# Altium PCB esp32_v2.PcbDoc
Units mil, origin at the board's own origin, x right, y up, seen from the top; angles counter-clockwise.
Board outline 3049 x 1672 mil, 2 copper layers (Top Layer, Bottom Layer); 49 components, 59 nets, 208 pads, 91 vias.
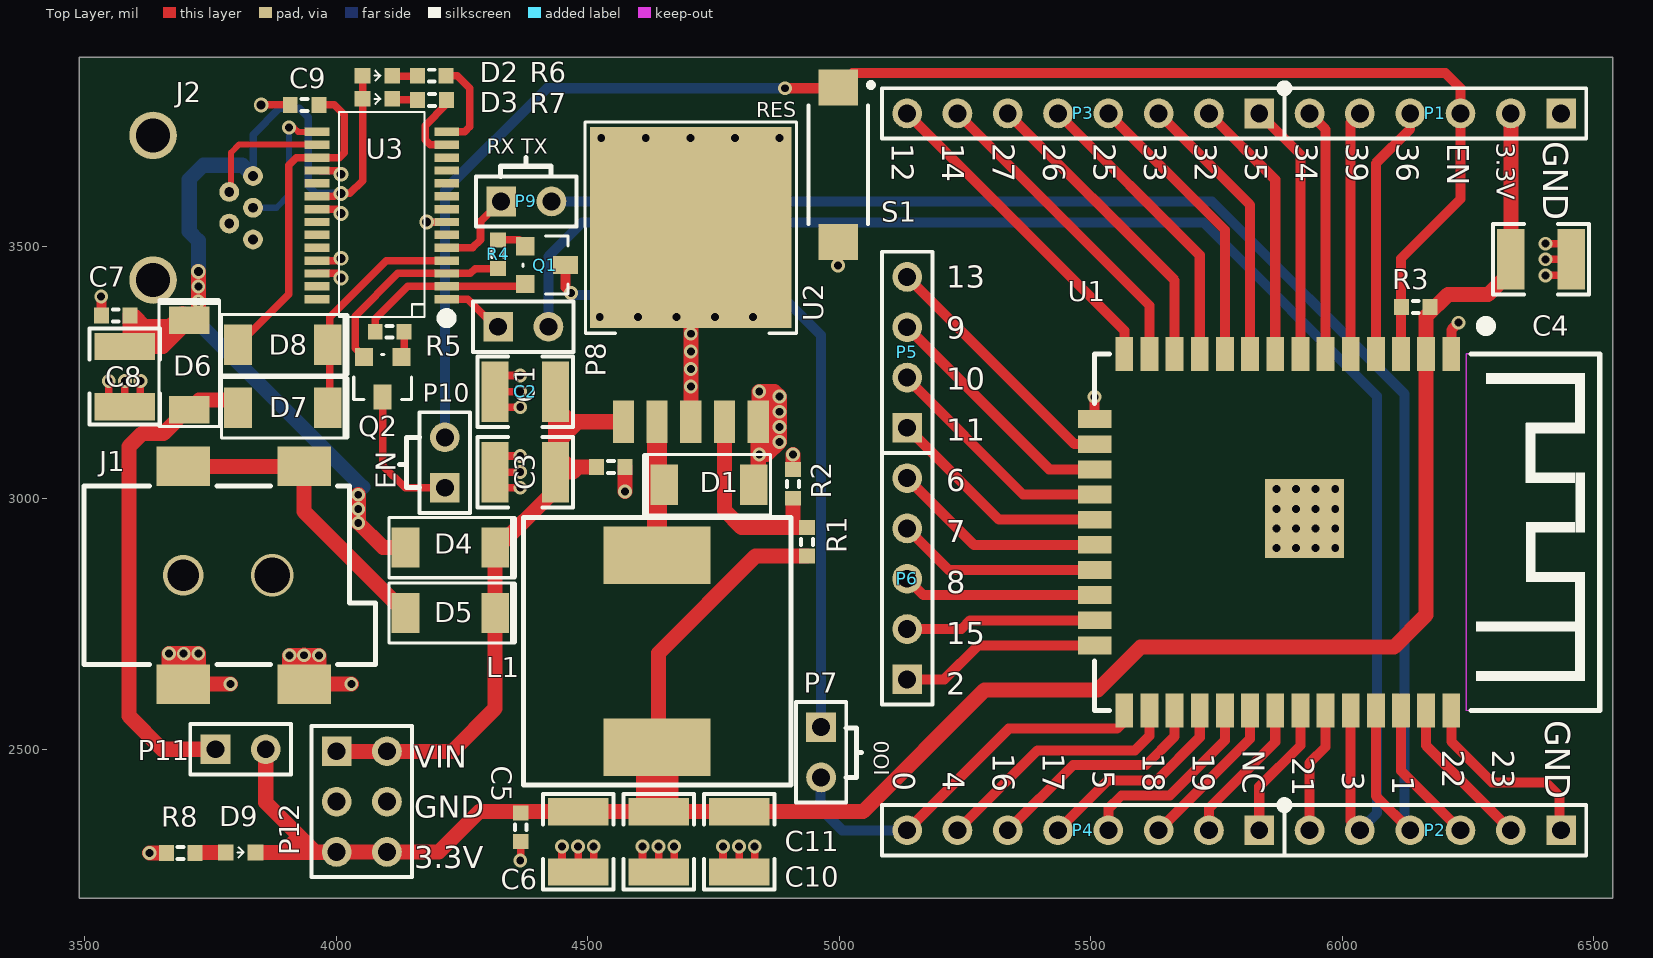
[diagram p0: Top Layer view]
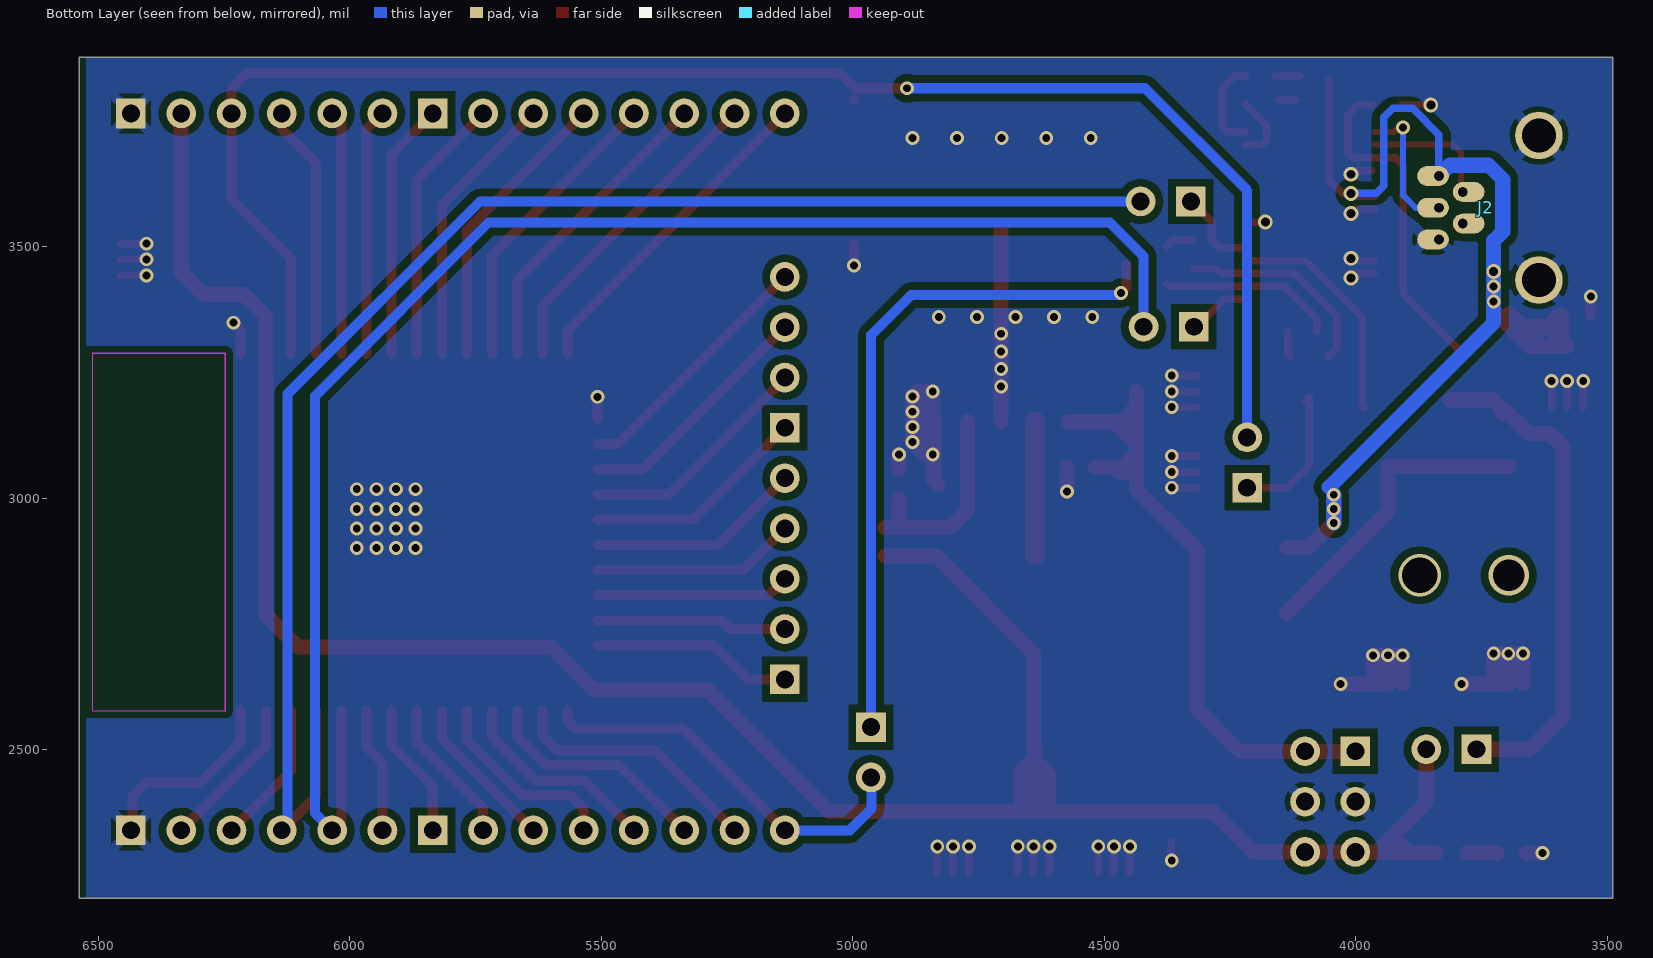
[diagram p1: Bottom Layer view, seen from below]
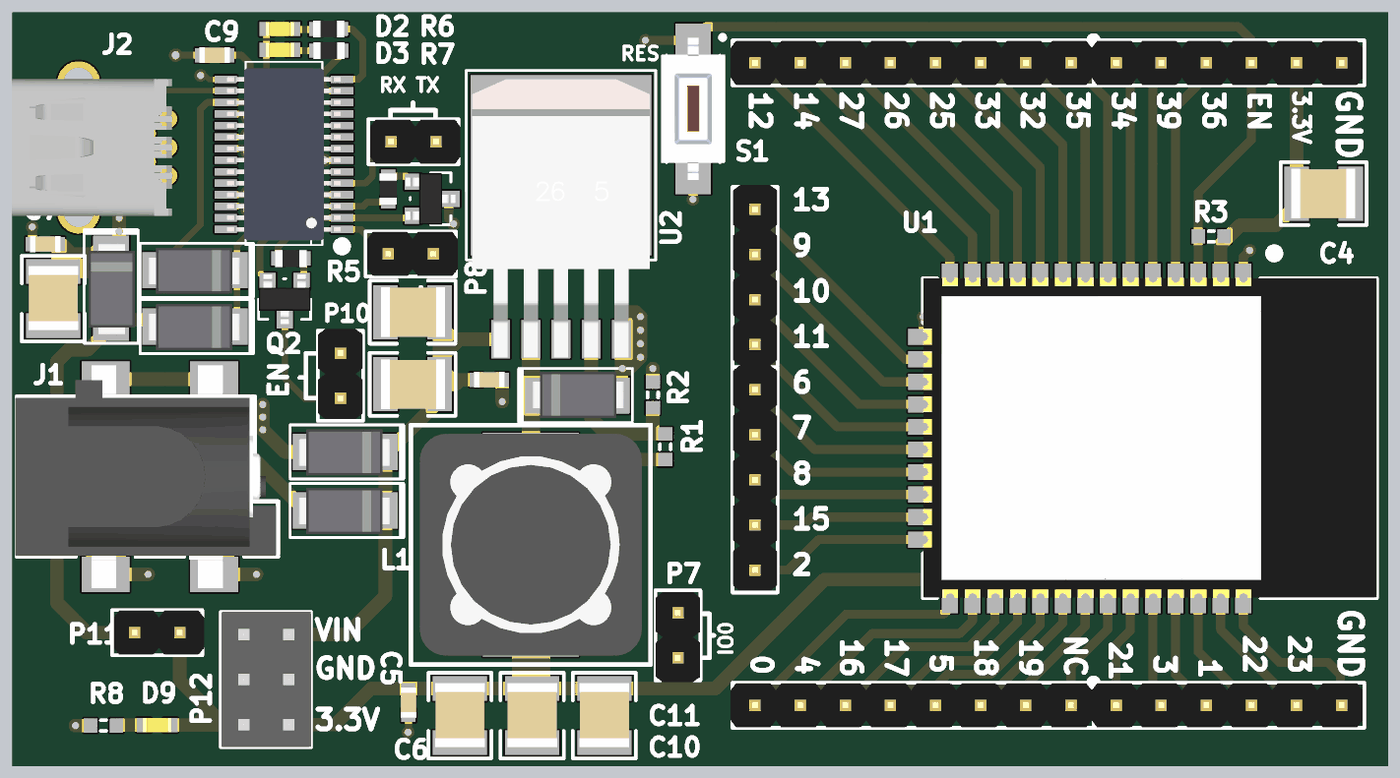
[diagram p2: 3D render of the assembled board from above, using the file's embedded part models]

## Layer stack, top to bottom
Top Solder: solder mask 0.4, Solder Resist, Dk 3.5
Top Layer: signal copper 1.4
Dielectric 1: dielectric 12.6, FR-4, Dk 4.8
Bottom Layer: signal copper 1.4
Bottom Solder: solder mask 0.4, Solder Resist, Dk 3.5

## Board outline
3489,2205 6538,2205 6538,3877 3489,3877

## Design rules (kind name [scope] priority, off if disabled: settings)
Clearance POLYGON [InPolygon] p1: gap=15 ignorepadtopadclearanceinfootprint=FALSE
Clearance [All] p2 off: gap=59.06 ignorepadtopadclearanceinfootprint=FALSE except(0: Arc-Hole Track-Hole SMDPad-Hole THPad-Hole Via-Hole Fill-Hole Poly-Hole Region-Hole Text-Hole)
ComponentClearance P1_P3 [InComponent('P1') vs InComponent('P3')] p1: gap=0 collisioncheckmode=3 verticalgap=0 showdistances=FALSE
ComponentClearance P6_P5 [InComponent('P5') vs InComponent('P6')] p2: gap=0 collisioncheckmode=3 verticalgap=0 showdistances=FALSE
ComponentClearance P4_P2 [InComponent('P4') vs InComponent('P2')] p3: gap=0 collisioncheckmode=3 verticalgap=0 showdistances=FALSE
ComponentClearance [All] p4: gap=10 collisioncheckmode=3 verticalgap=10 showdistances=FALSE
FabricationTestPointUsage TestPointUsage [All] p1: valid=0 allowmultiple=FALSE
FabricationTestpoint Testpoint [All] p1: side=3 testpointundercomponent=TRUE minsize=40 maxsize=100 preferedsize=60 minholesize=20 maxholesize=40 preferedholesize=32 testpointgrid=1 allowsidetop=TRUE allowsidebottom=TRUE usegrid=TRUE gridtolerance=0.01
HoleSize [All] p1: absolutevalues=TRUE maxlimit=393.7 minlimit=15.75 maxpercent=80.000 minpercent=20.000
MinimumAnnularRing [All] p1: minimumring=5.91
MinimumSolderMaskSliver [All] p1: minsoldermaskwidth=1
PlaneConnect [All] p1: planeconnectstyle=Direct reliefexpansion=20 reliefentries=4 reliefconductorwidth=10 reliefairgap=10
PolygonConnect Via [IsVia] p1: connectstyle=Direct reliefconductorwidth=10 reliefentries=4 polygonreliefangle="90 Angle" airgapwidth=10
PolygonConnect [All] p2: connectstyle=Relief reliefconductorwidth=20 reliefentries=4 polygonreliefangle="45 Angle" airgapwidth=10
RoutingVias [All] p1: holewidth=19.68 width=39.37 viastyle="Through Hole" minholewidth=15.75 minwidth=27.56 maxholewidth=28 maxwidth=196.85
SilkToSilkClearance [All] p1: silktosilkclearance=1
SilkToSolderMaskClearance [IsPad] p1: minsilkscreentomaskgap=2 clearancetoexposedcopper=TRUE
SolderMaskExpansion [All] p1: expansion=4
Width [All] p1: maxlimit=80 minlimit=6 preferedwidth=10
22 further rules are at their usual default settings.

## Components (designator, comment, footprint, x,y, rotation, side; value= is the part's Value field where it differs from the comment)
C1 "Ceramic X7R" C_0603_1608 4546,3062 r0 top value=100nF
C2 "Ceramic X5R" C_1210_3225 4376,3212 r180 top value=100uF
C3 "Ceramic X5R" C_1210_3225 4376,3052 r180 top value=100uF
C4 "Ceramic X5R" C_1210_3225 6395,3475 r0 top value=100uF
C5 "Ceramic X7R" C_0603_1608 4367,2346 r270 top value=100nF
C6 "Ceramic X5R" C_1210_3225 4481,2317 r270 top value=100uF
C7 "Ceramic X7R" C_0603_1608 3562,3363 r180 top value=100nF
C8 "Ceramic X5R" C_1210_3225 3580,3242 r270 top value=100uF
C9 "Ceramic X7R" C_0603_1608 3937.46,3782 r180 top value=100nF
C10 "Ceramic X5R" C_1210_3225 4641,2317 r270 top value=100uF
C11 "Ceramic X5R" C_1210_3225 4801,2317 r270 top value=100uF
D1 "SS14" SMA_DO-214AC 4741,3027 r0 top
D2 "Blue Led" OL_0603_1608 4082,3840 r180 top value=LTST-C190TBKT
D3 "Blue Led" OL_0603_1608 4082,3794 r180 top value=LTST-C190TBKT
D4 "SS14" SMA_DO-214AC 4227,2902 r180 top
D5 "SS14" SMA_DO-214AC 4227,2772 r180 top
D6 "SS14" SMA_DO-214AC 3708,3265 r270 top
D7 "SS14" SMA_DO-214AC 3894,3180 r180 top
D8 "SS14" SMA_DO-214AC 3894,3305 r180 top
D9 "Blue Led" OL_0603_1608 3810,2296 r180 top value=LTST-C190TBKT
J1 "J_DC" DC_5.5 3696,2847 r0 top
J2 "USB connector" J_USB_MINIB_54819-0519_THT 3741.32,3577.47 r0 top value=54819-0519
L1 "Inductor" L_SRR1280-XXXY 4638,2696.06 r270 top value=27uH
P1 "Goldpin" P_HEADER_1x6_2.54 6435,3765 r180 top value=DS1021-1*6SF1-1
P2 "Goldpin" P_HEADER_1x6_2.54 6435,2340 r180 top value=DS1021-1*6SF1-1
P3 "Goldpin" P_HEADER_1x8_2.54 5835,3765 r180 top value=DS1021-1*8SF1-1
P4 "Goldpin" P_HEADER_1x8_2.54 5835,2340 r180 top value=DS1021-1*8SF1-1
P5 "Goldpin" P_HEADER_1x4_2.54 5135,3140 r90 top value=DS1021-1*4SF1-1
P6 "Goldpin" P_HEADER_1x5_2.54 5135,2640 r90 top value=DS1021-1*5SF1-1
P7 "Goldpin" P_HEADER_1x2_2.54 4964,2545 r270 top value=DS1021-1*2SF1-1
P8 "Goldpin" P_HEADER_1x2_2.54 4322,3341 r0 top value=DS1021-1*2SF1-1
P9 "Goldpin" P_HEADER_1x2_2.54 4328,3590 r0 top value=DS1021-1*2SF1-1
P10 "Goldpin" P_HEADER_1x2_2.54 4216.14,3021 r90 top value=DS1021-1*2SF1-1
P11 "Goldpin" P_HEADER_1x2_2.54 3760,2501 r0 top value=DS1021-1*2SF1-1
P12 "Goldpin" P_HEADER_2x3_2.54 4001,2497 r270 top value="=\"Manufacturer Part Number\""
Q1 "BC847C" SOT23_TO236_SC59 4416,3463.5 r270 top value=BC847CLT1G
Q2 "BC847C" SOT23_TO236_SC59 4092.5,3241 r180 top value=BC847CLT1G
R1 "Resistor" R_NC_0603_1608 4936,2913.46 r270 top value=NC
R2 "Resistor" R_NC_0603_1608 4908.44,3028.46 r270 top value=NC
R3 "Resistor" R_NC_0603_1608 6146,3380 r180 top value=NC
R4 "Resistor" R_0603_1608 4322,3485 r90 top value=1k
R5 "Resistor" R_0603_1608 4106.43,3331 r0 top value=1k
R6 "Resistor" R_0603_1608 4190.09,3840 r180 top value=200R
R7 "Resistor" R_0603_1608 4190.54,3792 r180 top value=200R
R8 "Resistor" R_NC_0603_1608 3691,2295 r0 top value=NC
S1 "3x6mm" S_TACTSWITCH3x6 4998,3663 r270 top
U1 "U_ESP32" ESP_WROOM_32 5891.73,2932.44 r270 top value="=\"Manufacturer Part Number\""
U2 "VR_LM2596" TO-263-6 4705,3508 r0 top value="=\"Manufacturer Part Number\""
U3 "U_FT232RL" SSOP28_5X10X17 4091,3562 r90 top value="=\"Manufacturer Part Number\""

## Footprints (in the part's own frame and the unit in brackets; to place one, negate y for a bottom-side part, rotate by r counter-clockwise, add the part's x,y. Pads: shape width x height; smd on the part's side, far side on the other; paste and mask are expansions set on the pad)
C_0603_1608 [mm]
  rect 0.75x0.8 smd: 1(-0.725,0) 2(0.725,0)
  silkscreen extent -0.15,-0.3 0.15,0.3, body extent -0.85,-0.45 0.85,0.45, height 0.89
C_1210_3225 [mil]
  rect 54x120 smd: 1(-60,0) 2(60,0)
  silkscreen extent -95,-70 95,70, body extent -72,-55 70,55, height 86
DC_5.5 [mm]
  rect 2.7x2 smd: 1(0,-5.5) 2(6.1,-5.5) 3(0,5.5) 3(6.1,5.5)
  silkscreen extent -5,-4.5 9.7,4.5, body extent -5.1,-6.28 9.6,6.28, height 10.89
ESP_WROOM_32 [mm] "Normal"
  rect 1.7x0.9 smd: 1(-9,8.255) 2(-9,6.985) 3(-9,5.715) 4(-9,4.445) 5(-9,3.175) 6(-9,1.905) 7(-9,0.635) 8(-9,-0.635) 9(-9,-1.905) 10(-9,-3.175) 11(-9,-4.445) 12(-9,-5.715) 13(-9,-6.985) 14(-9,-8.255) 25(9,-8.255) 26(9,-6.985) 27(9,-5.715) 28(9,-4.445) 29(9,-3.175) 30(9,-1.905) 31(9,-0.635) 32(9,0.635) 33(9,1.905) 34(9,3.175) 35(9,4.445) 36(9,5.715) 37(9,6.985) 38(9,8.255)
  rect 0.9x1.7 smd: 15(-5.715,-9.755) 16(-4.445,-9.755) 17(-3.175,-9.755) 18(-1.905,-9.755) 19(-0.635,-9.755) 20(0.635,-9.755) 21(1.905,-9.755) 22(3.175,-9.755) 23(4.445,-9.755) 24(5.715,-9.755)
  rect 4x4 smd: EP1(-0.7,0.845)
  Keep-Out Layer region: -9.026,15.75 9,15.75 9,9.026 -9.026,9.026
  Keep-Out Layer region: -9.012,15.75 9,15.75 9,9.012 -9.012,9.012
  Keep-Out Layer region: -9.024,15.75 9,15.75 9,9.024 -9.024,9.024
  Keep-Out Layer region: -9.026,15.75 9,15.75 9,9.026 -9.026,9.026
  Keep-Out Layer region: -9.012,15.75 9,15.75 9,9.012 -9.012,9.012
  Keep-Out Layer region: -9.024,15.75 9,15.75 9,9.024 -9.024,9.024
  Keep-Out Layer region: -9.026,15.75 9,15.75 9,9.026 -9.026,9.026
  Keep-Out Layer region: -9.012,15.75 9,15.75 9,9.012 -9.012,9.012
  Keep-Out Layer region: -9.024,15.75 9,15.75 9,9.024 -9.024,9.024
  silkscreen extent -10.67,-9.75 9,15.75, body extent -9.05,-9.77 9.02,15.77, height 3
J_USB_MINIB_54819-0519_THT [mm]
  round 1 hole 0.5: 1(2.375,1.6) 2(1.175,0.8) 3(2.375,0) 4(1.175,-0.8) 5(2.375,-1.6)
  oval 1.6x1 smd far side paste-100: 1(2.675,1.6) 2(0.875,0.8) 3(2.675,0) 4(0.875,-0.8) 5(2.675,-1.6)
  round 2.4 hole 1.7: 6(-2.675,-3.65) 6(-2.675,3.65)
  Top Layer pour cut-out: -4.425,3.1 -3.225,3.1 -3.225,-3.1 -4.425,-3.1
  Top Layer pour cut-out: 0.575,4.4 3.075,4.4 3.075,3 0.575,3
  Top Layer pour cut-out: 0.575,-4.3 3.075,-4.3 3.075,-2.9 0.575,-2.9
  body extent -6.42,-3.85 2.58,3.85, height 3.75
L_SRR1280-XXXY [mm]
  rect 2.9x5.4 smd: 1(-4.85,0) 2(4.85,0)
  silkscreen extent -6.75,-6.75 6.75,6.75, body extent -6.25,-6.25 6.25,6.25, height 7.51
OL_0603_1608 [mm]
  rect 0.8x0.8 smd: 1(-0.75,0) 2(0.75,0)
  silkscreen extent -0.15,-0.25 0.15,0.25, body extent -0.8,-0.4 0.8,0.4, height 0.75
P_HEADER_1x2_2.54 [mm] "Connector; Header; 2 Position; Straight; Male"
  rect 1.5x1.5 hole 0.9: 1(0,0)
  round 1.5 hole 0.9: 2(2.54,0)
  silkscreen extent -1.27,-1.27 3.81,1.27, body extent -1.17,-1.25 3.91,1.25, height 8.2
P_HEADER_1x4_2.54 [mm] "Connector; Header; 4 Position; Male"
  rect 1.5x1.5 hole 0.9: 1(0,0)
  round 1.5 hole 0.9: 2(2.54,0) 3(5.08,0) 4(7.62,0)
  silkscreen extent -1.27,-1.27 8.89,1.27, body extent -1.17,-1.25 8.99,1.25, height 8.2
P_HEADER_1x5_2.54 [mm] "Connector; Header; 5 Position, Male"
  rect 1.5x1.5 hole 0.9: 1(0,0)
  round 1.5 hole 0.9: 2(2.54,0) 3(5.08,0) 4(7.62,0) 5(10.16,0)
  silkscreen extent -1.27,-1.27 11.43,1.27, body extent -1.17,-1.25 11.53,1.25, height 8.2
P_HEADER_1x6_2.54 [mm] "Connector; Header; 6 Position, Male"
  rect 1.5x1.5 hole 0.9: 1(0,0)
  round 1.5 hole 0.9: 2(2.54,0) 3(5.08,0) 4(7.62,0) 5(10.16,0) 6(12.7,0)
  silkscreen extent -1.27,-1.27 13.97,1.27, body extent -1.17,-1.25 14.07,1.25, height 8.2
P_HEADER_1x8_2.54 [mm] "Connector; Header; 8 Position; Male"
  rect 1.5x1.5 hole 0.9: 1(0,0)
  round 1.5 hole 0.9: 2(2.54,0) 3(5.08,0) 4(7.62,0) 5(10.16,0) 6(12.7,0) 7(15.24,0) 8(17.78,0)
  silkscreen extent -1.47,-1.47 19.05,1.27, body extent -1.17,-1.25 19.15,1.25, height 8.2
P_HEADER_2x3_2.54 [mm] "Connector; Header; 3x2 Position"
  rect 1.5x1.5 hole 0.9: 1(0,0)
  round 1.5 hole 0.9: 2(0,2.54) 3(2.54,0) 4(2.54,2.54) 5(5.08,0) 6(5.08,2.54)
  silkscreen extent -1.27,-1.27 6.35,3.81, body extent -1.27,-1.23 6.35,3.81, height 8.5
R_0603_1608 [mm]
  rect 0.75x0.8 smd: 1(-0.725,0) 2(0.725,0)
  silkscreen extent -0.15,-0.3 0.15,0.3, body extent -0.87,-0.47 0.88,0.48, height 0.54
R_NC_0603_1608 [mm]
  rect 0.75x0.8 smd: 1(-0.725,0) 2(0.725,0)
  silkscreen extent -0.15,-0.3 0.15,0.3, body extent -0.87,-0.47 0.88,0.48, height 0.54
S_TACTSWITCH3x6 [mm] "SODFL, 2-Leads, Body 3,00x8,00mm, IPC Medium Density"
  rect 1.8x2 smd: 1(-3.9,0) 2(3.9,0)
  silkscreen extent -4.15,-1.5 3,1.78, body extent -4,-1.8 4,1.8, height 2.6
SMA_DO-214AC [mil]
  rect 55x80 smd: 1(-89,0) 2(89,0)
  silkscreen extent -133,-60 122,60, body extent -100,-50 104,52, height 95
SOT23_TO236_SC59 [mil]
  rect 36x36 smd: 1(-37.5,-40) 2(37.5,-40)
  rect 36x50 smd: 3(0,40)
  silkscreen extent -57,-45 58,45, body extent -57,-55 57,55, height 51
SSOP28_5X10X17 [mm]
  rect 0.42x1.25 smd: 1(-4.225,-3.275) 2(-3.575,-3.275) 3(-2.925,-3.275) 4(-2.275,-3.275) 5(-1.625,-3.275) 6(-0.975,-3.275) 7(-0.325,-3.275) 8(0.325,-3.275) 9(0.975,-3.275) 10(1.625,-3.275) 11(2.275,-3.275) 12(2.925,-3.275) 13(3.575,-3.275) 14(4.225,-3.275) 15(4.225,3.275) 16(3.575,3.275) 17(2.925,3.275) 18(2.275,3.275) 19(1.625,3.275) 20(0.975,3.275) 21(0.325,3.275) 22(-0.325,3.275) 23(-0.975,3.275) 24(-1.625,3.275) 25(-2.275,3.275) 26(-2.925,3.275) 27(-3.575,3.275) 28(-4.225,3.275)
  silkscreen extent -5.43,-3.52 5.22,2.16, body extent -4.85,-3.2 4.85,3.2, height 1.02
TO-263-6 [mil]
  rect 42x85 smd: 1(-134,-356) 2(-67,-356) 3(0,-356) 4(67,-356) 5(134,-356)
  rect 400x400 smd: EP1(0,30)
  silkscreen extent -210,-180 210,240, body extent -197,-396 197,220, height 190

## Part data
C1 C5 C7 C9: library part C_100nF_50V_X7R_0603_5, "Capacitor", Dielectric=X7R, Manufacturer=Samsung, Manufacturer Part Number=CL10B104JB8NNNC, Tolerance (%)=5, Voltage=50V, HelpURL=http://www.tme.eu/pl/Document/4a42202b32dab16128fe107dd69598cc/samsung-chip-cap.pdf, Part Number=C_100nF_50V_X7R_0603_5, SCH_Footprint=0603, Supplier 1=TME, Supplier 2="RS Components", Supplier 3=Farnell, Supplier 4=Mouser, Supplier 5=Digi-Key, Supplier Part Number 1=CL10B104JB8NNNC
C2 C3 C4 C6 C8 C10 C11: library part C_100uF_6.3V_X5R_1210_20, "Capacitor", Dielectric=X5R, Manufacturer=TDK, Manufacturer Part Number=C3225X5R0J107M250AC, Tolerance (%)=20, Voltage=6.3V, HelpURL=https://datasheet.octopart.com/C3225X5R0J107M250AC-TDK-datasheet-41194876.pdf, Part Number=C_100uF_6.3V_X5R_1210_20, SCH_Footprint=1210, Supplier 1=TME, Supplier 2="RS Components", Supplier 3=Farnell, Supplier 4=Mouser, Supplier 5=Digi-Key, Supplier Part Number 2=7407685P, Supplier Part Number 3=2522162, Supplier Part Number 4=810-C3225X5R0J107M, Supplier Part Number 5=445-1437-1-ND
D1 D4 D5 D6 D7 D8: library part DS_SS14_1A_40V_SMA, Current=1A, Manufacturer="Fairchild Semiconductor", Voltage=40V, HelpURL=https://www.vishay.com/docs/88746/ss12.pdf, Manufacturer Part Number=SS14, Part Number=DS_SS14_1A_40V_SMA, SCH_Footprint=SMA, Supplier 1=TME, Supplier 2="RS Components", Supplier 3=Farnell, Supplier 4=Mouser, Supplier 5=Digi-Key, Supplier Part Number 4=512-SS14, Supplier Part Number 5=SS14CT
D2 D3 D9: library part OL_B_0603, "LED_BLUE", Manufacturer=Lite-On, Manufacturer Part Number=LTST-C190TBKT, HelpURL=https://datasheet.octopart.com/LTST-C190TBKT-Lite-On-datasheet-158557.pdf, Part Number=OL_B_0603, SCH_Footprint=0603, Supplier 1=TME, Supplier 2="RS Components", Supplier 3=Farnell, Supplier 4=Mouser, Supplier 5=Digi-Key, Supplier Part Number 1=LTST-C190TBKT, Supplier Part Number 2=6920994P, Supplier Part Number 4=859-LTST-C190TBKT, Supplier Part Number 5=160-1646-1-ND
J1: library part J_DC_5.5mm, Part Number=J_DC_5.5mm, Supplier 1=TME, Supplier 2="RS Components", Supplier 3=Farnell, Supplier 4=Mouser, Supplier 5=Digi-Key
J2: library part J_USB_MINIB_54819-0519, "Z³¹cze USB, Mini USB typu B, USB 2.0 OTG, Monta¿ przewlekany", Manufacturer=Molex, Manufacturer Part Number=54819-0519, Supplier Part Number 1=MX-54819-0519, Component Type=Standard, HelpURL=http://www.molex.com/pdm_docs/sd/548190519_sd.pdf, Part Number=J_USB_MINIB_54819-0519, SCH_Footprint=THT, Supplier 1=TME, Supplier 2="RS Components", Supplier 3=Farnell, Supplier 4=Mouser, Supplier 5=Digi-Key, Supplier Part Number 2=5152005P, Supplier Part Number 3=9786465, Supplier Part Number 4=538-54819-0519
L1: library part L_27uH_3.9A_SRR1280, "Induction", Current=3.9A, Manufacturer=Bourns, Manufacturer Part Number=SRR1280-270M, Resistance=52mR, HelpURL=https://www.bourns.com/pdfs/SRR1280.pdf, Part Number=L_27uH_3.9A_SRR1280, SCH_Footprint=12x12, Supplier 1=TME, Supplier 2="RS Components", Supplier 3=Farnell, Supplier 4=Mouser, Supplier 5=Digi-Key, Supplier Part Number 2=8749766P, Supplier Part Number 3=2333859, Supplier Part Number 4=652-SRR1280-270M
P1 P2: library part P_HEADER_1x6_2.54, "Header, 6-Pin", Manufacturer=Connfly, Manufacturer Part Number=DS1021-1*6SF1-1, Supplier Part Number 1=ZL201-06G, Component Type=Standard, HelpURL=http://www.tme.eu/en/Document/cc301e58a5da78cb543a94b5a5b7f06a/DS1021.pdf, Part Number=P_HEADER_1x6_2.54, SCH_Footprint="1x6 2.54mm", Supplier 1=TME, Supplier 2="RS Components", Supplier 3=Farnell, Supplier 4=Mouser, Supplier 5=Digi-Key
P3 P4: library part P_HEADER_1x8_2.54, "Header, 8-Pin", Manufacturer=Connfly, Manufacturer Part Number=DS1021-1*8SF1-1, Supplier Part Number 1=ZL201-08G, Component Type=Standard, HelpURL=http://www.tme.eu/en/Document/cc301e58a5da78cb543a94b5a5b7f06a/DS1021.pdf, Part Number=P_HEADER_1x8_2.54, SCH_Footprint="1x8 2.54mm", Supplier 1=TME, Supplier 2="RS Components", Supplier 3=Farnell, Supplier 4=Mouser, Supplier 5=Digi-Key
P5: library part P_HEADER_1x4_2.54, "Header, 4-Pin", Manufacturer=Connfly, Manufacturer Part Number=DS1021-1*4SF1-1, Supplier Part Number 1=ZL201-04G, Component Type=Standard, HelpURL=http://datasheet.octopart.com/DS1021-1%2A4SF1-1-Connfly-datasheet-65537859.pdf, Part Number=P_HEADER_1x4_2.54, SCH_Footprint="1x4 2.54mm", Supplier 1=TME, Supplier 2="RS Components", Supplier 3=Farnell, Supplier 4=Mouser, Supplier 5=Digi-Key
P6: library part P_HEADER_1x5_2.54, "Header, 5-Pin", Manufacturer=Connfly, Manufacturer Part Number=DS1021-1*5SF1-1, Supplier Part Number 1=ZL201-05G, Component Type=Standard, HelpURL=http://datasheet.octopart.com/DS1021-1%2A5SF1-1-Connfly-datasheet-65537859.pdf, Part Number=P_HEADER_1x5_2.54, SCH_Footprint="1x7 2.54mm", Supplier 1=TME, Supplier 2="RS Components", Supplier 3=Farnell, Supplier 4=Mouser, Supplier 5=Digi-Key
P7 P8 P9 P10 P11: library part P_HEADER_1x2_2.54, "Header, 2-Pin", Manufacturer=Connfly, Manufacturer Part Number=DS1021-1*2SF1-1, Supplier Part Number 1=ZL201-02G, Component Type=Standard, HelpURL=http://www.tme.eu/en/Document/cc301e58a5da78cb543a94b5a5b7f06a/DS1021.pdf, Part Number=P_HEADER_1x2_2.54, SCH_Footprint="1x2 2.54mm", Supplier 1=TME, Supplier 2="RS Components", Supplier 3=Farnell, Supplier 4=Mouser, Supplier 5=Digi-Key
P12: library part P_HEADER_2x3_2.54, "Header, 3-Pin, Dual row", Component Type=Standard, Part Number=P_HEADER_2x3_2.54, SCH_Footprint="2x3 2.54mm", Supplier 1=TME, Supplier 2="RS Components", Supplier 3=Farnell, Supplier 4=Mouser, Supplier 5=Digi-Key
Q1 Q2: library part QNP_BC847C_45V_0A1, Current=0A1, Manufacturer="ON Semiconductor", Manufacturer Part Number=BC847CLT1G, Voltage=45V, HelpURL=https://assets.nexperia.com/documents/data-sheet/BC847_SER.pdf, Part Number=QNP_BC847C_45V_0A1, SCH_Footprint=SOT23, Supplier 1=TME, Supplier 2="RS Components", Supplier 3=Farnell, Supplier 4=Mouser, Supplier 5=Digi-Key, Supplier Part Number 1=BC847CLT1G, Supplier Part Number 5=BC847CLT1GOSCT-ND, Type=NPN
R1 R2 R3 R8: library part R_GENERIC_0603, Part Number=R_GENERIC_0603, SCH_Footprint=0603, Supplier 1=TME, Supplier 2="RS Components", Supplier 3=Farnell, Supplier 4=Mouser, Supplier 5=Digi-Key
R4 R5: library part R_1k_0603_1, Manufacturer=Vishay, Manufacturer Part Number=CRCW06031K00FKEA, Power=100mW, Tolerance=1%, Voltage=75V, HelpURL=http://www.farnell.com/datasheets/2310790.pdf?_ga=2.256888843.1690599162.1548417389-1379097396.1542296996&_gac=1.262631934.1547230258.Cj0KCQiAmuHhBRD0ARIsAFWyPwhX8HcvXnM3tA0ZBodZLzDIjH2ZxLpjT5LWo9bad_HPRbU8LfPq44UaAhEwEALw_wcB, Part Number=R_1k_0603_1, SCH_Footprint=0603, Supplier 1=TME, Supplier 2="RS Components", Supplier 3=Farnell, Supplier 4=Mouser, Supplier 5=Digi-Key, Supplier Part Number 2=678-9875P, Supplier Part Number 3=1469740, Supplier Part Number 4=71-CRCW0603-1.0K-E3, Supplier Part Number 5=541-1.00KHCT-ND
R6 R7: library part R_200R_0603_1, Manufacturer=Royalohm, Manufacturer Part Number=0603SAF2000T5E, Power=100mW, Supplier Part Number 1=SMD0603-200R-1%, Tolerance=1%, Voltage=50V, HelpURL=http://www.tme.eu/pl/Document/b315665a56acbc42df513c99b390ad98/ROYALOHM-THICKFILM.pdf, Part Number=R_200R_0603_1, SCH_Footprint=0603, Supplier 1=TME, Supplier 2="RS Components", Supplier 3=Farnell, Supplier 4=Mouser, Supplier 5=Digi-Key, Supplier Part Number 4=667-ERJ-3EKF2000V, Supplier Part Number 5=P200HCT-ND
S1: library part S_TACTSWITCH, "Tact Switch", Manufacturer=Ninigi, Manufacturer Part Number=TACTM-34N-F, HelpURL=http://pl.ninigi.com/product/tactm-34n-f/pdf, Part Number=S_TACTSWITCH, SCH_Footprint=3x6mm, Supplier 1=TME, Supplier 2="RS Components", Supplier 3=Farnell, Supplier 4=Mouser, Supplier 5=Digi-Key, Supplier Part Number 1=TACTM-34N-F
U1: library part M_ESP32_WROOM, Part Number=M_ESP32_WROOM, SCH_Footprint=ESPWROOM, Supplier 1=TME, Supplier 2="RS Components", Supplier 3=Farnell, Supplier 4=Mouser, Supplier 5=Digi-Key
U2: library part VR_LM2596-ADJ, Part Number=VR_LM2596-ADJ, SCH_Footprint=TO-263-6, Supplier 1=TME, Supplier 2="RS Components", Supplier 3=Farnell, Supplier 4=Mouser, Supplier 5=Digi-Key
U3: library part U_FT232RLR, Part Number=U_FT232RLR, SCH_Footprint="28-LD SSOP", Supplier 1=TME, Supplier 2="RS Components", Supplier 3=Farnell, Supplier 4=Mouser, Supplier 5=Digi-Key

## Via types
v1: diameter 27.56, hole 15.75, Top Layer to Bottom Layer, tented both sides, 81 vias
v2: diameter 29.53, hole 17.72, Top Layer to Bottom Layer, tented both sides, 8 vias
v3: diameter 80, hole 62.99, Top Layer to Bottom Layer, tented both sides, 1 vias
v4: diameter 85, hole 70.87, Top Layer to Bottom Layer, tented both sides, 1 vias

## Nets (pads, with @x,y where several pads share a name; then routed paths per layer and width w, separated by ;. In a path a pad name is that pad's centre, name@x,y a point inside that pad or via, vN(x,y) a via of type N, cw(c..) or ccw(c..) an arc to the next point about the centre after c; other vN are vias at no path point)
+3.3V: C4.1 C5.1 C6.1 C10.1 C11.1 D9.1 L1.2 P1.2 P11.2 P12.5 P12.6 R1.2 R3.1 U1.2 | length 4902.7
  Top Layer w30: D9.1 3895,2296 ; P11.2 3860,2395 3927,2328 ; R1.2 4833.91,2884.91 4641.11,2692.11 4641.11,2502 L1.2 L1.2@4638,2485 ; P1.2 C4.1 6335,3450 6290,3405 6210,3405 6166.73,3361.73 U1.2 6166.73,2767.73 6103,2704 5599,2704 5514,2619 5289,2619 5047,2377 C11.1 C10.1@4661,2377 ; 3895,2296 4000,2296 P12.5 ; 3895,2296 3927,2328 ; 3927,2328 3958,2297 P12.5 ; P12.5 P12.6 4204,2297 4284,2377 C6.1 C10.1@4611,2377 ; C10.1@4611,2377 4611,2452 L1.2@4638,2479 ; C10.1@4611,2377 C10.1 ; L1.2@4638,2479 4638,2380 C10.1 ; L1.2@4638,2479 L1.2@4638,2485 ; L1.2@4638,2485 4666,2457 4666,2382 C10.1@4661,2377 ; C10.1 C10.1@4661,2377
+5.0V: C7.1 C8.1 D2.2 D3.2 D4.2 D6.1 J2.1 U3.20 | length 2443.9
  Top Layer w15: U3.20 3996.39,3600.39 4005,3609 4008,3606 4027.03,3606 4052.47,3631.44 D2.2@4052.47,3831
  Top Layer w30: v2(3726,3451) v1(3726,3421) v1(3726,3391) 3726,3372 D6.1 ; v1(4044,3007) v1(4044,2979) v1(4044,2951) 4044,2951.47 4093.47,2902 D4.2 ; C8.1@3590.54,3312.54 3619,3341 ; C8.1@3590.54,3312.54 C8.1 C8.1@3630,3302 ; C8.1@3590.54,3312.54 C7.1 3597,3363 3619,3341 ; 3619,3341 D6.1@3669,3341 ; C8.1@3630,3302 D6.1@3669,3341 ; C8.1@3630,3302 3656,3302 D6.1 ; D6.1@3669,3341 D6.1@3682,3354 ; D6.1@3682,3354 D6.1 ; D6.1@3682,3354 3695,3367 D6.1
  Bottom Layer w15: J2.1@3834.82,3640.46 3834.82,3722.82 3887,3775 3927.03,3775 3945,3757.03 3945,3620.94 3959.94,3606 v2@4011,3606
  Bottom Layer w30: v1@3726,3396 v1(3726,3391) 3726,3349 4053,3022 ; v1@3726,3400 v1(3726,3421) v2(3726,3451) 3726,3512 3708,3530 3708,3634 3736,3662 3813.28,3662 J2.1@3834.82,3640.46 ; v1(4044,2951) v1(4044,2979) v1(4044,3007)
  other v2: 4010,3606
EN: P1.3 P10.2 R3.2 S1.1 U1.3 | length 3197.6
  Top Layer w20: v1(4892,3815) 4996.46,3815 S1.1 5026.46,3845 6205,3845 6235,3815 P1.3 6235,3595 6116.73,3476.73 U1.3 ; S1.1@4998,3791.54 S1.1@4998,3793
  Bottom Layer w20: P10.2 4216.14,3612.14 4419,3815 v1(4892,3815)
GND: C1.2 C2.2 C3.2 C4.2 C5.2 C6.2 C7.2 C8.2 C9.2 C10.2 C11.2 D1.2 J1.1 J1.2 J2.5 J2.6 P1.1 P2.1 P12.3 P12.4 R2.1 R8.1 S1.2 U1.1 U1.15 U1.38 U1.EP1 U2.3 U2.5 U2.EP1 U3.7 U3.18 U3.21 U3.25 U3.26 | length 3711.6
  Top Layer w15: C8.2@3548,3182 v1(3548,3233) ; C8.2 v1(3580,3233) ; C8.2@3611,3182 v1(3611,3233) ; v2(3851,3782) 3908.14,3782 C9.2@3908.94,3781.2 ; U3.25 4000.57,3472.43 4006,3477.87 4006.87,3477 v2@4011,3477 ; U3.21 4001.2,3574.8 v2(4010,3566) ; U3.26@3964.86,3447 4002,3447 v2@4011,3438 ; U3.18@3968.86,3651 4012,3651 4010,3649 v2(4010,3644) ; v2(4180,3549) U3.7@4216.14,3549 ; C3.2@4315,3021 v1(4366,3021) ; C3.2@4315,3052 C3.2 v1(4366,3052) ; C3.2@4315,3084 v1(4366,3084) ; C2.2@4315,3181 v1(4366,3181) ; C2.2@4315,3212 C2.2 v1(4366,3212) ; C2.2@4315,3244 v1(4366,3244) ; v1(4366,2280) 4367,2280 C5.2 ; C6.2@4449,2257 v1(4449,2308) ; C6.2 v1(4481,2308) ; C6.2@4512,2257 v1(4512,2308) ; C10.2@4609,2257 v1(4609,2308) ; C10.2 v1(4641,2308) ; C10.2@4672,2257 v1(4672,2308) ; C11.2@4769,2257 v1(4769,2308) ; C11.2 v1(4801,2308) ; C11.2@4832,2257 v1(4832,2308) ; v1(6404,3443) C4.2@6455,3443 ; v1(6404,3475) C4.2 ; v1(6404,3506) C4.2@6455,3506
  Top Layer w20: C7.2 v1@3533.46,3400.54 ; v1(4997.32,3462.32) S1.2@4997.32,3506.56 ; U1.15 v1(5507.68,3201.68) v1@5508,3202 ; U1.38 6216.73,2516.27 6298,2435 6405,2435 6432,2408 6432,2343 P2.1 ; U1.1 6216.73,3334.73 v1(6231,3349)
  Top Layer w30: v1(3629,2295) R8.1 ; J1.1@3668,2633 v1(3668,2691.38) v1(3726,2691.38) J1.1@3726,2634 ; v1(3697,2691) 3697,2631.46 J1.1 v1(3790,2630.46) ; J1.2@3907,2630.46 v1(3907,2687.84) v1@3936,2687.84 ; v1(3936,2688) v1@3936,2687.84 ; v1(4030.16,2630.46) J1.2@3966,2630.46 ; v1(4574.54,3013.46) C1.2 ; U2.3 v1(4705,3222) v1(4705,3257) v1(4705,3292) v1(4705,3327) U2.EP1 ; D1.2 4839,3036 U2.5 ; R2.1 v1(4908.44,3087) ; v1@3936,2687.84 v1(3966,2687.84) J1.2@3966,2630.46 ; v1@3936,2687.84 3936,2630.62 J1.2 J1.2@3966,2630.46 ; U2.5 4841,3154 v1(4841,3212) ; U2.5 4861,3152 ; v1(4841,3212) 4861,3192 4861,3152 ; v1(4841,3212) 4871,3212 v1(4881,3202) v1(4881,3172) ; 4861,3152 v1(4881,3172) ; 4861,3152 4861,3107 v1(4841,3087) 4856,3087 v1(4881,3112) v1(4881,3142) v1(4881,3172)
  other v1: 5869,2901 5908,2901 5947,2901 5986,2901 5869,2940 5908,2940 5947,2940 5986,2940 5869,2979 5908,2979 5947,2979 5986,2979 5869,3018 5908,3018 5947,3018 5986,3018 4524,3360 4600.25,3360 4676.5,3360 4752.75,3360 4829,3360 3533,3401 4527,3716 4615.5,3716 4704,3716 4792.5,3716 4881,3716
  other v2: 4010,3438 4010,3477
IO0: P4.8 P7.2 U1.25 | length 795.1
  Top Layer w20: P4.8 5337,2542 5552,2542 5566.73,2556.73 U1.25
  Bottom Layer w20: P7.2 4963,2444 4963,2383 5006,2340 P4.8
NetC9_1: C9.1 D8.2 U3.17 | length 674.4
  Top Layer w15: D8.2@3789.5,3289.5 D8.2 3906,3406 3906,3662 3921.16,3677.16 U3.17 4006.16,3677.16 4016,3687 4016,3762 3996,3782 C9.1
NetD1_1: D1.1 L1.1 U2.2 | length 265
  Top Layer w40: L1.1 4638,3027 U2.2
NetD2_1: D2.1 R6.2 | length 50
  Top Layer w15: D2.1@4110.53,3839 R6.2@4160.54,3839
NetD3_1: D3.1 R7.2 | length 34.5
  Top Layer w15: D3.1@4118.53,3792 R7.2@4153,3792
NetD5_2: D5.2 J1.3 | length 615.3
  Top Layer w30: J1.3@3696,3063.54 3936.16,3063.54 3936.16,2973.84 D5.2
NetD6_2: D6.2 D7.2 P11.1 | length 1008.2
  Top Layer w30: D6.2@3708,3167 D6.2 ; P11.1 3654,2501 3588,2567 3588,3102.65 3614.35,3129 3657,3129 3704,3176 D6.2 ; D7.2@3814,3195 3727,3195 D6.2
NetD7_1: D7.1 D8.1 U3.4 | length 461.2
  Top Layer w15: D7.1 3987,3184 3987,3360 4099.43,3472.43 U3.4
NetD9_2: D9.2 R8.2 | length 61.3
  Top Layer w30: R8.2 3720.54,2296 D9.2
NetJ2_2: J2.2 U3.16 | length 257
  Top Layer w12: J2.2@3787.57,3608.97 3791,3612.39 3791,3687 3806.75,3702.75 U3.16
NetJ2_3: J2.3 U3.15 | length 276
  Top Layer w12: v1(3906,3737) 3916,3737 3924.66,3728.34 U3.15
  Bottom Layer w12: J2.3@3834.82,3577.47 3846.63,3577.47 3881.47,3577.47 3906,3602 v1(3906,3737)
NetP1_4: P1.4 U1.4 | length 506.5
  Top Layer w20: U1.4 6066.73,3665.73 6135,3734 P1.4
NetP1_5: P1.5 U1.5 | length 485.8
  Top Layer w20: U1.5 6016.73,3746.73 P1.5
NetP1_6: P1.6 U1.6 | length 491.4
  Top Layer w20: P1.6 5966.73,3733.27 U1.6
NetP2_2: P2.2 U1.37 | length 307.8
  Top Layer w20: U1.37 6166.73,2508.27 P2.2
NetP2_3: P2.3 U1.36 | length 287.1
  Top Layer w20: U1.36 6116.73,2458.27 P2.3
NetP2_6: P2.6 U1.33 | length 251.3
  Top Layer w20: P2.6 5935,2474 5966.73,2505.73 U1.33
NetP3_1: P3.1 U1.7 | length 512.1
  Top Layer w20: P3.1 5916.73,3683.27 U1.7
NetP3_2: P3.2 U1.8 | length 532.8
  Top Layer w20: P3.2 5866.73,3633.27 U1.8
NetP3_3: P3.3 U1.9 | length 553.5
  Top Layer w20: P3.3 5816.73,3583.27 U1.9
NetP3_4: P3.4 U1.10 | length 574.2
  Top Layer w20: P3.4 5766.73,3533.27 U1.10
NetP3_5: P3.5 U1.11 | length 594.9
  Top Layer w20: P3.5 5716.73,3483.27 U1.11
NetP3_6: P3.6 U1.12 | length 615.6
  Top Layer w20: P3.6 5666.73,3433.27 U1.12
NetP3_7: P3.7 U1.13 | length 636.3
  Top Layer w20: P3.7 5616.73,3383.27 U1.13
NetP3_8: P3.8 U1.14 | length 657.1
  Top Layer w20: P3.8 5566.73,3333.27 U1.14
NetP4_1: P4.1 U1.32 | length 272
  Top Layer w20: P4.1 5835,2427 5916.73,2508.73 U1.32
NetP4_2: P4.2 U1.31 | length 292.7
  Top Layer w20: P4.2 5735,2384 5866.73,2515.73 U1.31
NetP4_3: P4.3 U1.30 | length 313.4
  Top Layer w20: P4.3 5816.73,2521.73 U1.30
NetP4_4: P4.4 U1.29 | length 390.3
  Top Layer w20: P4.4 5535,2383 5561,2409 5657,2409 5766.73,2518.73 U1.29
NetP4_5: P4.5 U1.28 | length 411.6
  Top Layer w20: P4.5 5534,2439 5631,2439 5716.73,2524.73 U1.28
NetP4_6: P4.6 U1.27 | length 460.5
  Top Layer w20: P4.6 5465,2470 5610,2470 5666.73,2526.73 U1.27
NetP4_7: P4.7 U1.26 | length 509.9
  Top Layer w20: P4.7 5394,2499 5588,2499 5616.73,2527.73 U1.26
NetP5_1: P5.1 U1.19 | length 448.3
  Top Layer w20: P5.1 5317.56,2957.44 U1.19
NetP5_2: P5.2 U1.18 | length 470.2
  Top Layer w20: P5.2 5135,3238 5365.56,3007.44 U1.18
NetP5_3: P5.3 U1.17 | length 489.7
  Top Layer w20: P5.3 5417.56,3057.44 U1.17
NetP5_4: P5.4 U1.16 | length 510.4
  Top Layer w20: P5.4 5467.56,3107.44 U1.16
NetP6_1: P6.1 U1.24 | length 400.6
  Top Layer w20: P6.1 5209,2640 5276.44,2707.44 U1.24
NetP6_2: P6.2 U1.23 | length 379.9
  Top Layer w20: P6.2 5243,2740 5260.44,2757.44 U1.23
NetP6_3: P6.3 U1.22 | length 386.2
  Top Layer w20: P6.3 5167.56,2807.44 U1.22
NetP6_4: P6.4 U1.21 | length 406.9
  Top Layer w20: P6.4 5217.56,2857.44 U1.21
NetP6_5: P6.5 U1.20 | length 427.6
  Top Layer w20: P6.5 5267.56,2907.44 U1.20
NetP7_1: P7.1 Q1.3 | length 1370.9
  Top Layer w20: Q1.3 4456,3419 v1(4467,3408)
  Bottom Layer w20: v1(4467,3408) 4471,3404 4884,3404 4964,3324 P7.1
NetP8_1: P8.1 U3.1 | length 124.7
  Top Layer w15: U3.1 4261.34,3395.66 4316,3341 P8.1
NetP9_1: P9.1 U3.5 | length 167.8
  Top Layer w15: U3.5 4271.02,3498.02 4287,3514 4287,3551 4326,3590 P9.1
NetP10_1: P10.1 Q2.3 | length 287.3
  Top Layer w15: Q2.3 Q2.3@4099.5,3194 ; Q2.3@4092.93,3201 4092.93,3194 4092.93,3065.07 4137,3021 P10.1
NetQ1_1: Q1.1 R4.2 | length 59.2
  Top Layer w15: R4.2 4363.46,3513.54 Q1.1
NetQ1_2: Q1.2 R5.1 U3.2 | length 352.6
  Top Layer w15: R5.1 4077.89,3356.89 4142.25,3421.25 U3.2 4371.25,3421.25 Q1.2
NetQ2_1: Q2.1 R5.2 | length 51.9
  Top Layer w15: Q2.1@4130.43,3281 4134.98,3285.54 R5.2
NetQ2_2: Q2.2 R4.1 U3.3 | length 411.3
  Top Layer w15: Q2.2@4055.43,3281 4038,3298.43 4038,3362 4122.84,3446.84 U3.3 4267,3446.84 4276.61,3456.46 R4.1
NetR1_1: R1.1 R2.2 U2.4 | length 413.1
  Top Layer w30: U2.4 4772,2976 4806,2942 4911,2942 ; R2.2 4908.44,2944.56 4911,2942 ; R1.1 4911,2942
NetR6_1: R6.1 U3.14 | length 184.2
  Top Layer w15: R6.1 4241,3840 4266,3815 4266,3739 4255.34,3728.34 U3.14
NetR7_1: R7.1 U3.13 | length 134.6
  Top Layer w15: R7.1@4219.09,3783 4177,3740.91 4177,3713 4187.25,3702.75 U3.13
RX: P2.5 P8.2 U1.34 | length 3080.4
  Top Layer w20: U1.34 6016.73,2358.27 P2.5
  Bottom Layer w20: P8.2 4422,3481 4489,3548 5724,3548 6069,3203 6069,2374 P2.5
TX: P2.4 P9.2 U1.35 | length 2992.6
  Top Layer w20: U1.35 6066.73,2408.27 P2.4
  Bottom Layer w20: P9.2 5741,3590 6124,3207 6124,2351 P2.4
Vin: C1.1 C2.1 C3.1 D4.1 D5.1 P12.1 P12.2 U2.1 | length 1448.7
  Top Layer w30: P12.1 P12.2 4231,2497 4316,2582 D5.1 4316,2897 4436,3017 C3.1 ; C2.1 C2.1@4436,3182 ; C1.1 4481,3062 ; U2.1 4481,3152 ; C3.1 4471,3052 4481,3062 ; C3.1 C3.1@4436,3089.44 ; C3.1 4446,3062 4463.44,3062 ; C3.1@4436,3089.44 4463.44,3062 ; C3.1@4436,3089.44 C3.1@4436,3107 ; C3.1@4436,3107 4436,3142 ; C3.1@4436,3107 4481,3152 ; 4436,3142 C2.1@4436,3182 ; 4436,3142 4446,3152 4466,3152 ; C2.1@4436,3182 4466,3152 ; 4463.44,3062 4481,3062 ; 4466,3152 4481,3152
pads on no net: J2.4 U3.6 U3.8 U3.9 U3.10 U3.11 U3.12 U3.19 U3.22 U3.23 U3.24 U3.27 U3.28
copper on no net:
  other v3: 3696,2847
  other v4: 3873.17,2847

## Polygon pours and split planes (outlines as drawn)
GND on Bottom Layer "Bottom Layer-GND" (solid, pour order 0): 3489,3877 6524,3877 6524,2205 3489,2205

## Silkscreen, mask and mechanical layers (free items; w line width, h text height)
Top Overlay:
  lines w10: 4126,3067 4140,3067 ; 4166.14,3021 4140,3021 4140,3121 4166.14,3121 4166.14,3122 ; 4328,3640 4327,3640 4327,3660 4427,3660 4427,3642 ; 4377,3677 4377,3660 4378,3660 ; 5014,2445 5034,2445 5034,2543 5014,2543 ; 5034,2495 5044,2495
  text "RES" at 4835,3757 h30
  text "GND" at 6399,3710 h50 r270
  text "3.3V" at 6307,3707 h36 r270
  text "12" at 5104,3706 h44 r270
  text "14" at 5204.45,3706 h44 r270
  text "27" at 5304.91,3706 h44 r270
  text "26" at 5405.36,3706 h44 r270
  text "25" at 5505.82,3706 h44 r270
  text "33" at 5606.27,3706 h44 r270
  text "32" at 5706.73,3706 h44 r270
  text "35" at 5807.18,3706 h44 r270
  text "34" at 5907.64,3706 h44 r270
  text "39" at 6008.09,3706 h44 r270
  text "36" at 6108.55,3706 h44 r270
  text "EN" at 6209,3706 h44 r270
  text "RX TX" at 4299,3685 h30
  text "13" at 5213,3418 h44
  text "9" at 5213,3316.88 h44
  text "10" at 5213,3215.75 h44
  text "11" at 5213,3114.62 h44
  text "EN" at 4118,3018 h40 r90
  text "6" at 5213,3013.5 h44
  text "7" at 5213,2912.38 h44
  text "8" at 5213,2811.25 h44
  text "15" at 5213,2710.12 h44
  text "2" at 5213,2609 h44
  text "GND" at 6403,2559 h50 r270
  text "NC" at 5801.75,2500 h44 r270
  text "22" at 6198.75,2500 h44 r270
  text "23" at 6298,2500 h44 r270
  text "16" at 5305.5,2492.67 h44 r270
  text "17" at 5404.75,2492.67 h44 r270
  text "18" at 5603.25,2492.67 h44 r270
  text "19" at 5702.5,2492.67 h44 r270
  text "21" at 5901,2485.34 h44 r270
  text "VIN" at 4155,2464 h44
  text "5" at 5504,2459 h44 r270
  text "0" at 5107,2456.01 h44 r270
  text "4" at 5206.25,2456.01 h44 r270
  text "3" at 6000.25,2456.01 h44 r270
  text "IO0" at 5099,2448 h30 r90
  text "1" at 6099.5,2448 h44 r270
  text "GND" at 4155,2364.5 h44
  text "3.3V" at 4155,2265 h44
Mechanical 1:
  the board outline again, w10

## Text inside footprints (layer, text, board x,y; h text height)
C1: Mechanical 17 "d" at 4511,3057 h10; Mechanical 19 "-" at 4511,3057 h10
C2: Mechanical 17 "d" at 4436,3202 h20 r180; Mechanical 19 "-" at 4436,3242 h20 r180
C3: Mechanical 17 "d" at 4436,3042 h20 r180; Mechanical 19 "-" at 4436,3082 h20 r180
C4: Mechanical 17 "d" at 6335,3485 h20; Mechanical 19 "-" at 6335,3445 h20
C5: Mechanical 17 "d" at 4362,2381 h10 r270; Mechanical 19 "-" at 4362,2381 h10 r270
C6: Mechanical 17 "d" at 4491,2377 h20 r270; Mechanical 19 "-" at 4451,2377 h20 r270
C7: Mechanical 17 "d" at 3597,3368 h10 r180; Mechanical 19 "-" at 3597,3368 h10 r180
C8: Mechanical 17 "d" at 3590,3302 h20 r270; Mechanical 19 "-" at 3550,3302 h20 r270
C9: Mechanical 17 "d" at 3972.46,3787 h10 r180; Mechanical 19 "-" at 3972.46,3787 h10 r180
C10: Mechanical 17 "d" at 4651,2377 h20 r270; Mechanical 19 "-" at 4611,2377 h20 r270
C11: Mechanical 17 "d" at 4811,2377 h20 r270; Mechanical 19 "-" at 4771,2377 h20 r270
D1: Mechanical 17 "d" at 4636,2987 h15; Mechanical 19 "-" at 4636,2987 h15
D2: Mechanical 17 "d" at 4117,3845 h10 r180; Mechanical 19 "-" at 4117,3845 h10 r180
D3: Mechanical 17 "d" at 4117,3799 h10 r180; Mechanical 19 "-" at 4117,3799 h10 r180
D4: Mechanical 17 "d" at 4332,2942 h15 r180; Mechanical 19 "-" at 4332,2942 h15 r180
D5: Mechanical 17 "d" at 4332,2812 h15 r180; Mechanical 19 "-" at 4332,2812 h15 r180
D6: Mechanical 17 "d" at 3668,3370 h15 r270; Mechanical 19 "-" at 3668,3370 h15 r270
D7: Mechanical 17 "d" at 3999,3220 h15 r180; Mechanical 19 "-" at 3999,3220 h15 r180
D8: Mechanical 17 "d" at 3999,3345 h15 r180; Mechanical 19 "-" at 3999,3345 h15 r180
D9: Mechanical 17 "d" at 3845,2301 h10 r180; Mechanical 19 "-" at 3845,2301 h10 r180
J1: Mechanical 17 "d" at 3751.12,2864.72 h25; Mechanical 19 "-" at 3751.12,2805.66 h25
J2: Mechanical 17 "d" at 3524.78,3599.13 h25; Mechanical 19 "-" at 3524.78,3540.07 h25
L1: Mechanical 17 "d" at 4460.83,2853.54 h25 r270; Mechanical 19 "-" at 4706.9,2804.32 h25 r270
P1: Mechanical 17 "d" at 6505,3795 h60 r180; Mechanical 19 "-" at 6445,3800 h60 r180
P2: Mechanical 17 "d" at 6505,2370 h60 r180; Mechanical 19 "-" at 6445,2375 h60 r180
P3: Mechanical 17 "d" at 5825,3800 h60 r180; Mechanical 19 "-" at 5735,3805 h60 r180
P4: Mechanical 17 "d" at 5825,2375 h60 r180; Mechanical 19 "-" at 5735,2380 h60 r180
P5: Mechanical 17 "d" at 5165,3105 h60 r90; Mechanical 19 "-" at 5165,3105 h60 r90
P6: Mechanical 17 "d" at 5170,2600 h60 r90; Mechanical 19 "-" at 5170,2600 h60 r90
P7: Mechanical 17 "d" at 4954,2580 h25 r270; Mechanical 19 "-" at 4954,2580 h25 r270
P8: Mechanical 17 "d" at 4287,3331 h25; Mechanical 19 "-" at 4287,3331 h25
P9: Mechanical 17 "d" at 4293,3580 h25; Mechanical 19 "-" at 4293,3580 h25
P10: Mechanical 17 "d" at 4226.14,2986 h25 r90; Mechanical 19 "-" at 4226.14,2986 h25 r90
P11: Mechanical 17 "d" at 3725,2491 h25; Mechanical 19 "-" at 3725,2491 h25
P12: Mechanical 17 "d" at 4041,2542 h30 r270; Mechanical 19 "-" at 4041,2542 h30 r270
Q1: Mechanical 17 "d" at 4411,3513.5 h20 r270; Mechanical 19 "-" at 4411,3513.5 h20 r270
Q2: Mechanical 17 "d" at 4142.5,3246 h20 r180; Mechanical 19 "-" at 4142.5,3246 h20 r180
R1: Mechanical 17 "d" at 4941,2943.46 h10 r270; Mechanical 19 "-" at 4921,2943.46 h10 r270
R2: Mechanical 17 "d" at 4913.44,3058.46 h10 r270; Mechanical 19 "-" at 4893.44,3058.46 h10 r270
R3: Mechanical 17 "d" at 6176,3375 h10 r180; Mechanical 19 "-" at 6176,3395 h10 r180
R4: Mechanical 17 "d" at 4317,3455 h10 r90; Mechanical 19 "-" at 4337,3455 h10 r90
R5: Mechanical 17 "d" at 4076.43,3336 h10; Mechanical 19 "-" at 4076.43,3316 h10
R6: Mechanical 17 "d" at 4220.09,3835 h10 r180; Mechanical 19 "-" at 4220.09,3855 h10 r180
R7: Mechanical 17 "d" at 4220.54,3787 h10 r180; Mechanical 19 "-" at 4220.54,3807 h10 r180
R8: Mechanical 17 "d" at 3661,2300 h10; Mechanical 19 "-" at 3661,2280 h10
S1: Mechanical 17 "d" at 4948,3793 h25 r270; Mechanical 19 "-" at 4948,3793 h25 r270
U1: Mechanical 17 "d" at 5871.73,2952.44 h50 r270; Mechanical 19 "-" at 5871.73,2952.44 h50 r270
U2: Mechanical 17 "d" at 4615,3503 h15; Mechanical 19 "-" at 4615,3503 h15
U3: Mechanical 17 "d" at 4116,3377 h25 r90; Mechanical 19 "-" at 4116,3377 h25 r90